# Altium PCB InfoDisplayPreReRoute.PcbDoc (part 2 of 2)
Units mil, origin at the board's own origin, x right, y up, seen from the top; angles counter-clockwise.
Board outline 4606.3 x 1732.28 mil, 2 copper layers (Top Layer, Bottom Layer), stack 65.792 mil thick; 218 components, 174 nets, 682 pads, 190 vias.
Unrouted connection lines stored in the file: 55.
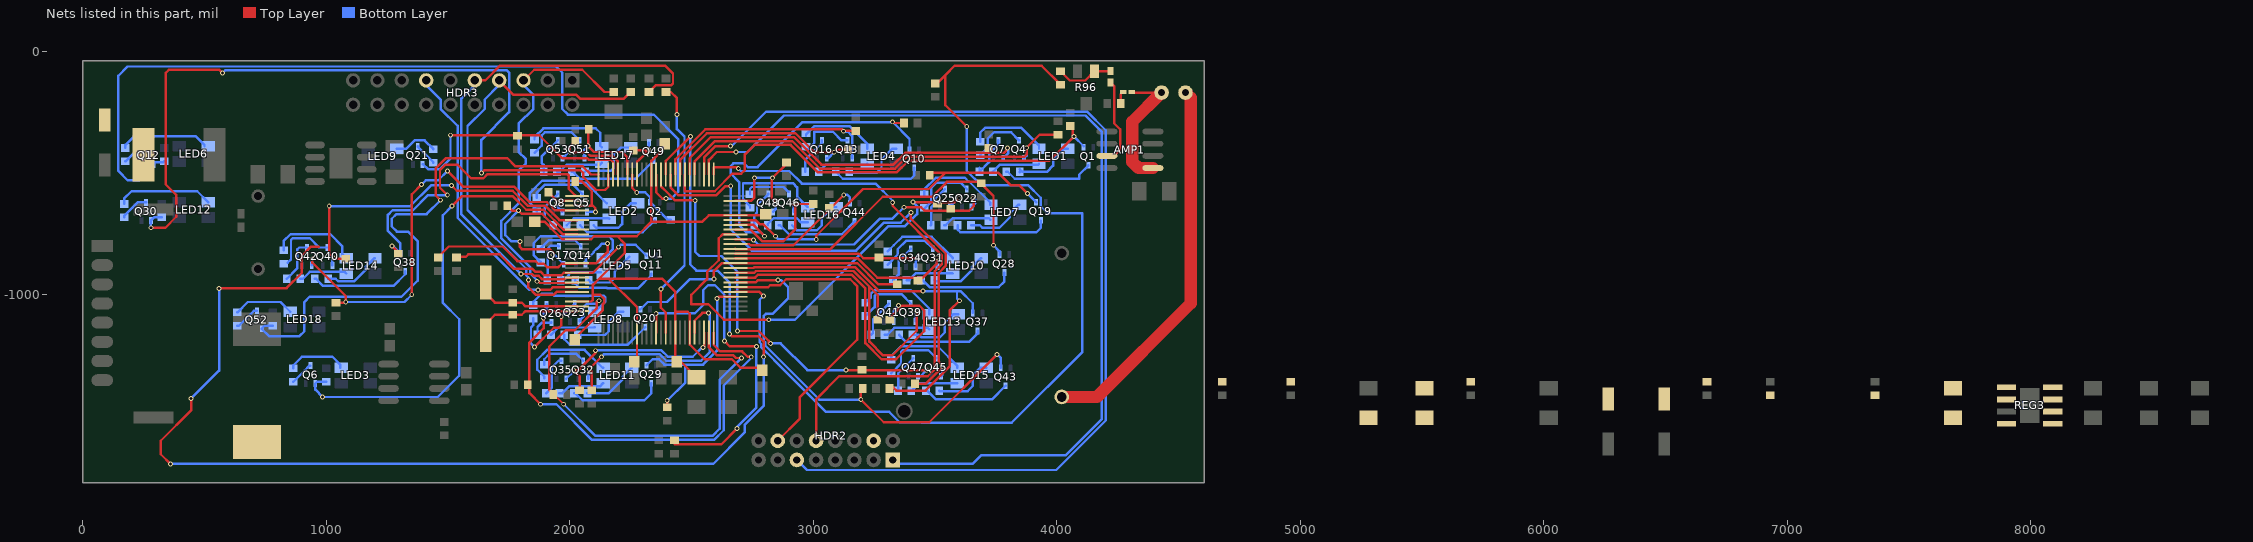
[diagram p2: the nets of this part, all layers, seen from the top]

## Via types
v1: diameter 20, hole 12, Top Layer to Bottom Layer, 173 vias
v2: diameter 50, hole 28, Top Layer to Bottom Layer, 7 vias
v3: diameter 19.68, hole 7.87, Top Layer to Bottom Layer, 6 vias
v4: diameter 137.8, hole 98.43, Top Layer to Bottom Layer, 4 vias

## Nets (pads, with @x,y where several pads share a name; then routed paths per layer and width w, separated by ;. In a path a pad name is that pad's centre, name@x,y a point inside that pad or via, vN(x,y) a via of type N, cw(c..) or ccw(c..) an arc to the next point about the centre after c; other vN are vias at no path point) (continued)
JTAG_TCK: HDR3.9 R1.1 U1.18 | length 2167
  Top Layer w10: HDR3.9@1610,-120 1652.69,-120 1713.69,-59 2390.58,-59 2423.72,-92.14 2423.72,-132.74 2417.27,-139.19 2353.37,-139.19 R1.1@2325,-167.56 ; v1(1800,-915) 1844.7,-915 1852.44,-922.74 1872.44,-922.74 1885.7,-936 1974.62,-936 1976.23,-934.39 1979.17,-934.39 1982.57,-931 2028.64,-931 U1.18@2030,-929.64
  Bottom Layer w10: HDR3.9@1610,-120 1610,-138.94 1555,-193.94 1555,-670 v1(1800,-915)
JTAG_TDI: HDR3.5 R3.1 U1.19 | length 1583.8
  Top Layer w10: HDR3.5@1810,-120 1854,-76 2051,-76 2142.56,-167.56 R3.1@2180,-167.56 ; v1(1865,-945) 1870,-945 1877,-952 2027.33,-952 U1.19@2030,-949.33
  Bottom Layer w10: HDR3.5@1810,-120 1810,-138.94 1850.53,-179.47 1850.53,-236.79 1790,-297.31 1790,-413.3 1820,-443.3 1820,-460.7 1790,-490.7 1790,-625.3 1719,-696.3 1719,-768.7 1837,-886.7 1837,-912 1870,-945 v1(1865,-945)
JTAG_TDO: HDR3.13 U1.20 | length 1235.6
  Top Layer w10: v1(1870,-980) 1920,-980 1930.99,-969.01 U1.20@2030,-969.01
  Bottom Layer w10: HDR3.13@1410,-120 1410,-138.94 1469.47,-198.42 1469.47,-236.79 1539,-306.31 1539,-684 1835,-980 v1(1870,-980)
JTAG_TMS: HDR3.7 R2.1 U1.21 | length 1807.6
  Top Layer w10: HDR3.7@1710,-120 1769.47,-179.47 2026.79,-179.47 2042.31,-195 2222.56,-195 R2.1@2250,-167.56 ; v1(1830,-940) 1830,-969.7 1861.3,-1001 1933.7,-1001 1946,-988.7 U1.21@2030,-988.7
  Bottom Layer w10: HDR3.7@1710,-120 1710,-138.94 1650.53,-198.42 1650.53,-236.79 1580,-307.31 1580,-652.33 1821,-893.33 1821,-921 1830,-930 v1(1830,-940)
LED_B_BATTERY: Q26.2 R71.1 U1.50 | length 1859.9
  Top Layer w10: v1(1880,-1450) 1834,-1404 1834,-1196.3 1892.5,-1137.8 v1(1892.5,-1095) ; U1.50@2591.02,-1156.02 2591.02,-1206.02 2618,-1233 2707.7,-1233 2729.7,-1255 v1(2745,-1255)
  Bottom Layer w10: v1(1880,-1450) 1945.3,-1450 2091.3,-1596 2592.54,-1596 2632,-1556.54 2632,-1373 2745,-1260 v1(2745,-1255) ; v1(1892.5,-1095) 1892.5,-1077.5 1905,-1065 Q26.2@1905,-1040
LED_B_BRAKING: Q41.2 R83.1 U1.58 | length 1437.4
  Top Layer w10: U1.58@2679.61,-929.64 2760.92,-929.64 2771.97,-918.59 3158.59,-918.59 3214,-974 3214,-1199 3280,-1265 3340,-1265 3455,-1150 3455,-1065 3435,-1045 3365.3,-1045 3315,-1095.3 R83.1@3315,-1102.44
  Bottom Layer w10: Q41.2@3330,-1110 3330,-1065 v1(3350,-1045)
LED_B_CHARGING: Q25.2 R70.1 U1.67 | length 1827.7
  Top Layer w10: U1.67@2679.61,-752.48 2627.52,-752.48 2611.64,-768.36 2611.64,-858.36 2564,-906 2564,-936 2499,-1001 2499,-1039 2569,-1039 2633,-1103 v1(2817,-1103) ; v1(3410,-620) 3580,-620 v1(3597.19,-602.81)
  Bottom Layer w10: v1(2817,-1103) 2924.22,-1103 3307.41,-719.82 3375.17,-719.82 3426,-668.99 3426,-636 v1(3410,-620) ; Q25.2@3560,-640 v1(3597.19,-602.81)
LED_B_CLUTCH: Q35.2 R78.1 U1.48 | length 800.4
  Top Layer w10: R78.1@2040,-1392.44 2040,-1335 v1(2015,-1310) 2035,-1310 2105,-1240 v1(2105,-1230) ; v1(2546.88,-1216.88) 2551.65,-1212.11 U1.48@2551.65,-1156.02
  Bottom Layer w10: Q35.2@1985.3,-1345 2015,-1315.3 v1(2015,-1310) ; v1@2105,-1229 2376.63,-1229 2402.63,-1255 2505,-1255 2543.12,-1216.88 v1(2546.88,-1216.88)
LED_B_DONE: Q48.2 R90.1 U1.74 | length 483.8
  Top Layer w10: U1.74@2679.61,-614.68 2744,-614.68 2758,-600.68 v1(2758,-520) ; v1(2847.93,-623.94) 2848.94,-623.94 2830,-605 2830,-523 v1(2833,-520) 2890,-463 R90.1@2890,-457.44
  Bottom Layer w10: v1(2758,-520) v1(2833,-520) ; Q48.2@2835,-660 2845,-650 2845,-630 2850,-625 2848.94,-623.94 v1(2847.93,-623.94)
LED_B_ENERGIZED: Q34.2 R77.1 U1.63 | length 807.4
  Top Layer w10: U1.63@2679.61,-831.22 3186.47,-831.22 3205.25,-850 3430.35,-850 v1(3433.73,-846.62)
  Bottom Layer w10: Q34.2@3420,-885 3420,-865 3433.73,-851.27 v1(3433.73,-846.62)
LED_B_ENGINE: Q17.2 R64.1 U1.9 | length 766.6
  Top Layer w10: R64.1@1742.56,-635 1762.56,-655 v1(1790,-655) 1802.35,-667.35 1886.24,-667.35 1971.37,-752.48 U1.9@2030,-752.48 ; v1(1794.94,-781) 1794.94,-804.18 1803.42,-812.65 1917.65,-812.65 v1@1932.5,-827.5
  Bottom Layer w10: v1(1790,-655) 1735,-710 1735,-755 1761,-781 v1(1794.94,-781) ; v1(1930,-835) 1935,-835 Q17.2@1975,-875 Q17.2@1975,-870
LED_B_FUEL: Q47.2 R89.1 U1.87 | length 1769.2
  Top Layer w10: U1.87@2374.49,-506.42 2374.49,-555.09 2379.24,-559.84 2379.24,-560.19 2385.68,-566.63 2386.03,-566.63 2432.4,-613 v1(2515,-613) ; v1(2688,-1149) 2776,-1149 2817,-1190 2817,-1200 v1(2825,-1200) ; v1(3135,-1310) v1(3465,-1310)
  Bottom Layer w10: v1(2515,-613) 2515,-824 2532,-841 2623,-841 2688,-906 v1(2688,-1149) ; v1(2825,-1200) 2866,-1200 2976,-1310 v1(3135,-1310) ; Q47.2@3430,-1335 3440,-1335 v1(3465,-1310)
LED_B_HYBRID: Q16.2 R63.1 U1.83 | length 871.1
  Top Layer w10: U1.83@2453.23,-506.42 2453.23,-446.77 2563,-337 2926.63,-337 3004.63,-415 v1(3085,-415) 3095,-405 R63.1@3142.44,-405
  Bottom Layer w10: Q16.2@3055,-440 3060,-440 v1(3085,-415)
LED_B_LOGGING: Q42.2 R84.1 U1.4 | length 1785.3
  Top Layer w10: v1(942.5,-852.5) 942.5,-868.5 1080,-1006 v1(1080,-1030) 1077.56,-1032.44 R84.1@1040,-1032.44 ; v1(1351,-1000) 1351,-588 v1(1391,-548) ; v1(1498,-492) 1562,-556 1771,-556 1834.35,-619.35 1906.12,-619.35 1940.83,-654.05 U1.4@2030,-654.05
  Bottom Layer w10: Q42.2@940,-880 940,-855 v1(942.5,-852.5) ; v1(1080,-1030) 1321,-1030 v1(1351,-1000) ; v1(1391,-548) 1409,-530 1460,-530 v1(1498,-492)
LED_B_MOTOR1: Q53.2 R93.1 U1.96 | length 361.6
  Top Layer w10: R93.1@2022.56,-370 2000,-392.56 v1(2000,-415) 2070,-415 2085,-430 2175,-430 2197.32,-452.32 U1.96@2197.32,-506.42
  Bottom Layer w10: Q53.2@1970,-440 1995,-415 v1(2000,-415)
LED_B_MOTOR2: Q8.2 R39.1 U1.2 | length 192
  Top Layer w10: R39.1@1912.56,-580 1947.91,-615.35 v1(1947.91,-623.78) 1961.22,-623.78 1970.32,-614.68 U1.2@2030,-614.68
  Bottom Layer w10: v1@1947.91,-625 1947.91,-637.91 Q8.2@1970,-660 ; v1(1947.91,-623.78) v1@1950.4,-626.27
LED_B_READY: Q7.2 R33.1 U1.81 | length 1558.7
  Top Layer w10: U1.81@2492.6,-506.42 2492.6,-439.13 2578.73,-353 2920,-353 3033,-466 3329,-466 3377.5,-417.5 3720,-417.5 ; R33.1@3720,-397.56 3720,-417.5 ; v1(3797.81,-397.95) 3800,-400.14 3782.64,-417.5 3720,-417.5
  Bottom Layer w10: Q7.2@3780,-440 3800,-420 3800,-400.14 v1(3797.81,-397.95)
LED_G_BATTERY: Q23.2 R69.1 U1.49 | length 1947.7
  Top Layer w10: v1(1975,-1450) 1915,-1390 1915,-1213.73 1982.73,-1146 2020.15,-1146 2110,-1056.15 2110,-1030 2115,-1025 v1(2120,-1025) ; U1.49@2571.34,-1156.02 2571.34,-1216.34 2604,-1249 2672.06,-1249 2683.06,-1260 v1(2705,-1260)
  Bottom Layer w10: v1(1975,-1450) 2105,-1580 2585.91,-1580 2616,-1549.91 2616,-1349 v1(2705,-1260) ; Q23.2@2040,-1110 2040,-1105.71 2058.33,-1087.38 2058.33,-1048.79 2069.77,-1037.35 2107.65,-1037.35 v1(2120,-1025) v1@2121.66,-1025
LED_G_BRAKING: Q39.2 R81.1 U1.59 | length 1335.2
  Top Layer w10: U1.59@2679.61,-909.96 2757.98,-909.96 2765.35,-902.59 3165.22,-902.59 3230,-967.37 ; R81.1@3265,-1102.44 3265,-1002.37 3230,-967.37 ; v1@3420,-1070 3425,-1075 3425,-1148 3324,-1249 3286.63,-1249 3230,-1192.37 3230,-967.37
  Bottom Layer w10: Q39.2@3420,-1110 v1@3420,-1070
  other v1: 3425,-1070
LED_G_CHARGING: Q22.2 R68.1 U1.66 | length 1149
  Top Layer w10: U1.66@2679.61,-772.16 2747.16,-772.16 2750,-775 v1(2755,-775) ; v1(3372,-641) 3442.5,-641 3456.18,-654.68 3640.32,-654.68 3658.41,-636.59 v1@3658.41,-604.47 ; v1(3655.32,-603.69) v1@3656.11,-604.47
  Bottom Layer w10: v1(2755,-775) 2774,-794 3167.75,-794 3273.93,-687.82 3325.18,-687.82 v1(3372,-641) ; Q22.2@3650,-640 3665,-625 3665,-605 3664.47,-604.47 3656.11,-604.47 v1(3655.32,-603.69)
LED_G_CLUTCH: Q32.2 R76.1 U1.46 | length 959.2
  Top Layer w10: R76.1@2090,-1392.44 2090,-1315 v1(2080,-1305) v1(2130,-1255) ; U1.46@2512.28,-1156.02 2512.28,-1107 2544.28,-1075 v1(2570,-1075)
  Bottom Layer w10: Q32.2@2075,-1345 2075,-1310 v1(2080,-1305) ; v1(2130,-1255) 2140,-1245 2370,-1245 2396,-1271 2539,-1271 2575,-1235 v1@2575,-1075
LED_G_DONE: Q46.2 R88.1 U1.68 | length 520.5
  Top Layer w10: U1.68@2679.61,-732.79 2742.79,-732.79 2791,-781 2876.29,-781 2925,-732.29 2925,-635 2920,-630 v1(2920,-621.25) ; v1@2920,-620 2927.56,-627.56 R88.1@3000,-627.56
  Bottom Layer w10: Q46.2@2920,-660 v1(2920,-621.25)
LED_G_ECONOMY: Q6.2 R30.2 U1.8 | length 2039.5
  Top Layer w10: v1(1517,-636) 1558,-595 1764.75,-595 1821.09,-651.35 1892.87,-651.35 1974.31,-732.79 U1.8@2030,-732.79
  Bottom Layer w10: R30.2@1000,-1357.56 962.44,-1357.56 Q6.2@955,-1365 955,-1390 v1(985,-1420) 1458,-1420 1546,-1332 1546,-1101 1479,-1034 1479,-674 v1(1517,-636)
LED_G_ENERGIZED: Q31.2 R75.1 U1.62 | length 949
  Top Layer w10: U1.62@2679.61,-850.9 3183.53,-850.9 3262.63,-930 3450,-930 3507.53,-872.47 v1(3507.53,-847)
  Bottom Layer w10: v1(3507.53,-847) 3507.53,-882.53 Q31.2@3510,-885
LED_G_ENGINE: Q14.2 R62.1 U1.15 | length 948.4
  Top Layer w10: R62.1@1458.78,-846.22 1503,-802 1724.88,-802 1784.88,-862 1859.58,-862 1870.58,-873 1893.05,-873 1908.05,-888 1951.95,-888 1966.95,-873 2027.59,-873 U1.15@2030,-870.59 2109.41,-870.59 2155,-825 v1(2155,-790)
  Bottom Layer w10: Q14.2@2065,-875 2065,-859.7 2098.33,-826.37 2098.33,-823.79 2111.12,-811 2113.7,-811 2126,-798.7 2126,-796.12 2132.12,-790 v1(2155,-790)
LED_G_FUEL: Q45.2 R87.1 U1.85 | length 2248.9
  Top Layer w10: U1.85@2413.86,-506.42 2413.86,-560.43 2444.43,-591 2602.02,-591 2639.02,-554 v1(2661,-554) ; v1(3401,-662) 3401,-688.14 3544.53,-831.67 3544.53,-880.72 3515,-910.25 3515,-1275 3530,-1290 v1(3530,-1295) 3530,-1297.33 3462.33,-1365 R87.1@3417.56,-1365
  Bottom Layer w10: v1(2661,-554) 2661,-732 2747.95,-818.95 3175.49,-818.95 3290.62,-703.82 3359.18,-703.82 v1(3401,-662) ; Q45.2@3525,-1335 3530,-1330 v1(3530,-1295) v1@3530,-1290
LED_G_HYBRID: Q13.2 R61.1 U1.84 | length 994.5
  Top Layer w10: U1.84@2433.54,-506.42 2433.54,-443.83 2556.37,-321 3118,-321 3125.29,-328.29 3125.94,-328.94 v1(3124.64,-328.94) 3126.03,-327.56 R61.1@3175,-327.56
  Bottom Layer w10: v1@3130,-330 3129,-330 3128,-331 3142.34,-331 3159.19,-347.85 3159.19,-439.19 Q13.2@3160,-440
LED_G_LOGGING: Q40.2 R82.1 U1.6 | length 1416.7
  Top Layer w10: v1(1012,-636) 1012,-832 v1(1030,-850) 1032.44,-852.44 R82.1@1080,-852.44 ; v1(1514.06,-551.06) 1536,-573 1765.37,-573 1827.72,-635.35 1899.49,-635.35 1957.57,-693.42 U1.6@2030,-693.42
  Bottom Layer w10: v1(1012,-636) 1345,-636 1429.94,-551.06 v1(1514.06,-551.06) ; Q40.2@1025,-880 1025,-855 v1(1030,-850)
LED_G_MOTOR1: Q51.2 R92.1 U1.94 | length 378
  Top Layer w10: R92.1@2077.56,-320 2075,-322.56 v1(2075,-390) 2099,-414 2214,-414 2236.69,-436.69 U1.94@2236.69,-506.42
  Bottom Layer w10: Q51.2@2060,-440 2060,-405 v1(2075,-390)
LED_G_MOTOR2: Q5.2 R24.1 U1.3 | length 274.6
  Top Layer w10: R24.1@2022.56,-535 2050,-535 2090.21,-575.21 2090.21,-630.21 2095,-635 ; U1.3@2030.63,-635 2095,-635 ; v1(2105,-660) 2105,-645 2095,-635
  Bottom Layer w10: Q5.2@2070,-660 v1(2105,-660)
LED_G_PERFORMANCE: Q52.2 R94.2 U1.100 | length 2278.4
  Top Layer w10: v1(1469,-612) 1448.7,-591.7 1448.7,-482.35 1492.05,-439 1743,-439 1777,-473 2053,-473 2086.42,-506.42 U1.100@2118.58,-506.42
  Bottom Layer w10: R94.2@780,-1127.56 746.81,-1127.56 Q52.2@734.69,-1139.69 765,-1170 890,-1170 910,-1150 910,-1030 931.29,-1008.71 1308.86,-1008.71 1375,-942.56 1375,-780 1336,-741 1290.09,-741 1269,-719.91 1269,-688 1288,-669 1412,-669 v1(1469,-612)
LED_G_READY: Q4.2 R21.1 U1.80 | length 1749.2
  Top Layer w10: U1.80@2512.28,-506.42 2512.28,-453.72 2597,-369 2913.37,-369 3026.37,-482 3335.63,-482 3383.63,-434 3866,-434 3876.15,-423.85 v1(3876.15,-396.48) 3930.07,-342.56 R21.1@4005,-342.56
  Bottom Layer w10: Q4.2@3865,-440 3876.15,-428.85 v1(3876.15,-396.48)
LED_R_BATTERY: Q20.2 R66.1 U1.61 | length 1188.8
  Top Layer w10: v1(2592,-936) 2592,-903 2624.41,-870.59 U1.61@2679.61,-870.59 3180.59,-870.59 3267.56,-957.56 R66.1@3345,-957.56
  Bottom Layer w10: Q20.2@2290,-1060 2320,-1030 2399.7,-1030 2493.7,-936 v1(2592,-936)
LED_R_BRAKING: Q37.2 R79.1 U1.60 | length 1702.9
  Top Layer w10: U1.60@2679.61,-890.27 2755.04,-890.27 2758.72,-886.59 3171.84,-886.59 3270.25,-985 v1(3450,-985) ; R79.1@3312.56,-1380 3327.56,-1380 3341.28,-1393.72 3460.98,-1393.72 3560,-1294.7 3560,-1065 v1(3600,-1025)
  Bottom Layer w10: v1(3450,-985) 3590,-985 ; v1(3600,-1025) 3590,-1015 3590,-985 ; Q37.2@3655,-1075 3655,-1035 3605,-985 3590,-985
LED_R_CHARGING: Q19.2 R65.1 U1.70 | length 1509.2
  Top Layer w10: U1.70@2679.61,-693.42 2763,-693.42 2780.58,-711 2795,-711 2844,-760 v1(2845,-760) ; v1(3012,-773) 3012,-758 3204,-566 3474,-566 3540.31,-499.69 ; R65.1@3477.56,-510 3487.87,-499.69 3540.31,-499.69 ; v1(3880,-585) 3844.81,-549.81 3810.43,-549.81 3760.32,-499.69 3540.31,-499.69
  Bottom Layer w10: v1(2845,-760) 2844,-760 2857,-773 v1(3012,-773) ; v1(3880,-585) Q19.2@3915,-620
LED_R_CLUTCH: Q29.2 R73.1 U1.54 | length 831.8
  Top Layer w10: R73.1@2400,-1462.44 v1(2400,-1435) ; v1(2605,-1015) 2611.62,-1008.38 U1.54@2679.61,-1008.38
  Bottom Layer w10: Q29.2@2315,-1290 2340,-1265 2366.58,-1265 2388.58,-1287 2475,-1287 ; v1(2400,-1435) 2475,-1360 2475,-1287 ; v1(2605,-1015) 2605,-1229.7 2547.7,-1287 2475,-1287
LED_R_DONE: Q44.2 R86.1 U1.65 | length 587.4
  Top Layer w10: U1.65@2679.61,-791.85 2737.15,-791.85 2742.3,-797 2918,-797 v1(3125,-590)
  Bottom Layer w10: v1(3125,-590) 3140,-590 3150,-600 Q44.2@3150,-625
LED_R_ENERGIZED: Q28.2 R72.1 U1.64 | length 1453.2
  Top Layer w10: U1.64@2679.61,-811.53 2681.07,-813 3070,-813 3285,-598 3487.25,-598 3548.25,-537 3682,-537 3740,-595 v1@3740,-796.97
  Bottom Layer w10: v1(3739.5,-796.97) 3764.98,-822.44 Q28.2@3764.98,-838.26
LED_R_ENGINE: Q11.2 R56.1 U1.17 | length 891.6
  Top Layer w10: R56.1@1535,-847.44 1538.44,-844 1573.37,-844 1583.37,-834 1711.63,-834 1771.63,-894 1846.33,-894 1858.6,-906.27 1881.07,-906.27 1894.79,-920 1965.21,-920 1975.25,-909.96 U1.17@2030,-909.96 2095.04,-909.96 v1(2200,-805)
  Bottom Layer w10: v1(2200,-805) 2210,-795 2270,-795 Q11.2@2315,-840
LED_R_FAULT: Q12.2 R60.1 U1.88 | length 3560.7
  Top Layer w10: U1.88@2354.8,-506.42 2354.8,-580.41 2379.7,-605.3 v1(2395,-605.3)
  Bottom Layer w10: R60.1@335,-452.56 331.34,-456.22 298.78,-456.22 Q12.2@290,-465 274.69,-480.31 274.69,-488 232.69,-530 184,-530 146,-492 146,-101 184,-63 1944,-63 1969,-88 1969,-237.53 1992,-260.53 2344.83,-260.53 2445,-360.7 2445,-577.4 2417.09,-605.3 v1(2395,-605.3)
LED_R_FUEL: Q43.2 R85.1 U1.57 | length 1847.1
  Top Layer w10: U1.57@2679.61,-949.33 2763.86,-949.33 2773.19,-940 v1(2855,-940) ; R85.1@3202.56,-1380 3195,-1387.56 v1(3195,-1430) 3289,-1524 3476,-1524 v1(3755,-1245)
  Bottom Layer w10: v1(2855,-940) 2868,-940 2896,-968 2896,-1014.91 2832.21,-1078.7 2805.3,-1078.7 2796,-1088 2796,-1189.67 2803,-1196.67 2803,-1209.67 3024.33,-1431 3195,-1431 v1(3195,-1430) ; v1(3755,-1245) 3770,-1260 Q43.2@3770,-1300
LED_R_GROUND: Q21.2 R67.1 U1.97 | length 1000.8
  Top Layer w10: v1(1510,-345) 1874.7,-345 1969.7,-440 2072.37,-440 2078.37,-446 2168.37,-446 2177.64,-455.27 U1.97@2177.64,-506.42
  Bottom Layer w10: Q21.2@1395,-465 1398.42,-465 1417.73,-484.31 1465.69,-484.31 1510,-440 v1(1510,-345)
LED_R_HYBRID: Q10.2 R42.1 U1.69 | length 1464
  Top Layer w10: U1.69@2679.61,-713.11 2754.11,-713.11 2800,-759 v1(2800,-760) ; v1(3325,-290) 3330,-295 R42.1@3372.44,-295
  Bottom Layer w10: v1(2800,-760) 2800,-759 2785,-744 2726,-744 2695.28,-713.28 2695.28,-537.28 2661,-503 2661,-472 2672,-461 2716,-461 2731,-476 2771,-476 2956,-291 v1@3325,-291 ; v1@3326,-291 3395,-360 Q10.2@3395,-405
LED_R_LOGGING: Q38.2 R80.1 U1.1 | length 1324.3
  Top Layer w10: v1(1270,-800) 1295,-825 R80.1@1295,-832.44 ; v1(1497,-591) 1467,-561 1467,-488 1488,-467 1540,-467 1595,-522 1645.7,-522 1662.7,-505 1990,-505 1995,-510 1995,-565 U1.1@2022.5,-592.5
  Bottom Layer w10: v1(1270,-800) 1274.37,-800 Q38.2@1304.37,-830 1304.37,-789.37 1253,-738 1253,-672 1272,-653 1356,-653 1418,-591 v1(1497,-591)
LED_R_MOTOR1: Q49.2 R91.1 U1.92 | length 214.3
  Top Layer w10: R91.1@2260,-407.56 v1@2322.44,-407.56 ; U1.92@2276.06,-506.42 2276.06,-453.64 2283.49,-446.21 2283.79,-446.21 v1@2322.44,-407.56 ; v1(2325,-405) v1@2322.44,-407.56
  Bottom Layer w10: v1(2325,-405) Q49.2@2325,-375
LED_R_MOTOR2: Q2.2 R15.1 U1.93 | length 272.6
  Top Layer w10: U1.93@2256.38,-506.42 2256.38,-561.38 v1@2270,-575
  Bottom Layer w10: v1(2275,-580) 2310,-580 2330,-600 Q2.2@2330,-620 2402.56,-692.56 R15.1@2415,-692.56
LED_R_READY: Q1.2 R9.1 U1.82 | length 1995.6
  Top Layer w10: U1.82@2472.91,-506.42 2472.91,-575 2595.39,-575 2667.39,-503 2704,-503 2719,-488 2719,-424 2758,-385 2906.75,-385 3019.75,-498 3342.25,-498 3390.25,-450 3970,-450 v1(4070,-350) 4065,-345 4065,-317.56 R9.1@4055,-307.56
  Bottom Layer w10: v1(4070,-350) Q1.2@4110.31,-390.31
LED_R_WARNING: Q30.2 R74.1 U1.98 | length 3326.1
  Top Layer w10: v1(280,-725) 339,-725 384,-680 384,-590 341,-547 341,-89 353,-77 561,-77 v1(574,-90) ; v1(1637,-501) 1649,-489 2044,-489 2055,-500 2055,-517.37 2107.63,-570 2145,-570 2157.95,-557.05 U1.98@2157.95,-506.42
  Bottom Layer w10: v1(280,-725) Q30.2@280,-695 292.44,-682.56 R74.1@325,-682.56 ; v1(574,-90) 585,-79 1742,-79 1751,-88 1751,-250 1637,-364 v1(1637,-501)
NetAMP1_3: AMP1.3 C26.2 | length 357.8
  Top Layer w10: AMP1.3@4205.51,-430 4235,-430 4260,-405 4260,-320.73 4235,-295.73 4235,-143.62 C26.2@4220,-128.62
NetAMP1_5: AMP1.5 C27.1 C28.2 | length 553
  Top Layer w10: C28.2@4307.72,-167.28 4310.43,-170 C27.1@4430,-170
  Top Layer w50: AMP1.5@4394.49,-480 4335,-480 4310,-455 4310,-290 C27.1@4430,-170
NetC16_1: C16.1 C17.1 C18.1 C19.1 C20.1 C21.1 C22.1 C25.1 U1.10 U1.23 U1.34 U1.42 U1.45 U1.71 U1.89 | length 3736.9
  Top Layer w10: C17.1@1855.43,-700 1896.27,-700 1968.43,-772.16 U1.10@2030,-772.16 2087.84,-772.16 2100,-760 2195,-760 ; C22.1@2020,-1169.57 2030.43,-1169.57 2135,-1065 2135,-1039.7 2141,-1033.7 2141,-1016.3 2124.7,-1000 2095,-1000 ; U1.23@2030,-1028.07 2086.93,-1028.07 ; 2088,-1028.07 2095,-1021.07 2095,-1000 ; 2159.49,-934.49 2276.06,-1051.06 U1.34@2276.06,-1156.02 2276.06,-1273.5 2275,-1274.57 C18.1@2265,-1274.57 ; C20.1@2390,-380.43 2390,-395.43 2335,-450.43 2335,-700 ; 2433.54,-1103.46 U1.42@2433.54,-1156.02 ; 2436.14,-1070 2484.37,-1070 2492.6,-1078.23 U1.45@2492.6,-1156.02 2492.6,-1205.04 2552.55,-1265 2665.43,-1265 2700.43,-1300 2790,-1300 C19.1@2790,-1309.57 C19.1@2790,-1311.53 ; C16.1@2520,-1338.98 2460,-1278.98 2444.41,-1278.98 C25.1@2440,-1274.57 2433.54,-1268.11 U1.42@2433.54,-1156.02 ; C21.1@2804.57,-670 2800.83,-673.74 U1.71@2679.61,-673.74 2571.26,-673.74 2545,-700 2335,-700 ; 2095,-1000 2095,-960 2121.03,-933.97 ; 2121.03,-933.97 2225,-830 2225,-790 2195,-760 ; 2121.03,-933.97 2378.97,-933.97 2433.54,-988.54 U1.42@2433.54,-1156.02 ; 2195,-760 2275,-760 2335,-700
NetC26_1: C26.1 R95.1 R96.1 | length 236.9
  Top Layer w10: R95.1@4015,-82.44 4053.01,-120.45 4116.87,-120.45 R96.1@4155.43,-81.89 4219.49,-81.89 C26.1@4220,-81.38
NetC27_2: C27.2 SPK1.1 | length 1563.5
  Top Layer w50: SPK1.1@4020,-1420 4165.2,-1420 4550,-1035.2 4550,-191.57 C27.2@4528.43,-170
NetC28_1: C28.1 R97.1 | length 51.7
  Top Layer w10: R97.1@4262.56,-215 4262.56,-177.01 C28.1@4272.28,-167.28
NetC33_1: C33.1 REG3.2
NetC33_2: C33.2 L1.1 REG3.1 ZD3.K
NetC35_1: C35.1 REG3.5
NetC35_2: C35.2 R105.2
NetC36_1: C36.1 REG3.7
NetLED1_1: LED1.1 R7.2 | length 273
  Bottom Layer w10: R7.2@3847.56,-497 R7.2@3847.56,-495 ; LED1.1@4045,-400 4030,-400 3985,-445 3985,-469.65 3959.01,-495.65 R7.2@3858.2,-495.65 ; R7.2@3852.56,-490 3847.56,-485 R7.2@3852.56,-490 ; R7.2@3852.56,-490 R7.2@3858.2,-495.65 ; R7.2@3852.56,-490 R7.2@3858.2,-495.65
NetLED1_3: LED1.3 R13.2 | length 202.9
  Bottom Layer w10: R13.2@3737.56,-495 3766.95,-465.61 3795.91,-465.61 3796.3,-466 3923.88,-466 LED1.3@3926.89,-462.99
NetLED1_4: LED1.4 R10.2 | length 330.1
  Bottom Layer w10: R10.2@3685,-372.44 3685,-335 3705,-315 3854.3,-315 3926.89,-387.59 LED1.4@3926.89,-400
NetLED2_1: LED2.1 R8.2 | length 247.3
  Bottom Layer w10: R8.2@2097.56,-715 2107.56,-725 2200,-725 2215,-710 2215,-660 2250,-625 LED2.1@2270,-625
NetLED2_3: LED2.3 R14.2 | length 186.9
  Bottom Layer w10: R14.2@1987.56,-715 2016.28,-686.28 2160.18,-686.28 LED2.3@2161.89,-687.99
NetLED2_4: LED2.4 R11.2 | length 462.4
  Bottom Layer w10: R11.2@1865,-657.56 1865,-651.46 1836.28,-622.75 1836.28,-582.14 1886.6,-531.82 2021.82,-531.82 2030,-540 2066.89,-540 LED2.4@2151.89,-625
NetLED3_4: LED3.4 R12.2 | length 245.1
  Bottom Layer w10: R12.2@865,-1302.44 865,-1290 900,-1255 1025,-1255 1056.89,-1286.89 LED3.4@1056.89,-1300
NetLED4_1: LED4.1 R16.2 | length 259.4
  Bottom Layer w10: R16.2@3147.56,-495 3147.56,-500 3260,-500 3280,-480 3280,-445 3325,-400 LED4.1@3340,-400
NetLED4_3: LED4.3 R22.2 | length 212.6
  Bottom Layer w10: R22.2@3022.56,-495 3051.56,-466 3218.88,-466 LED4.3@3221.89,-462.99
NetLED4_4: LED4.4 R19.2 | length 320
  Bottom Layer w10: R19.2@2970,-347.44 2970,-342.37 3004.43,-307.94 3147.94,-307.94 3221.89,-381.89 LED4.4@3221.89,-400
NetLED5_1: LED5.1 R17.2 | length 230.8
  Bottom Layer w10: R17.2@2077.56,-940 2087.56,-950 2165,-950 2185,-930 2185,-903.22 2243.22,-845 LED5.1@2245,-845
NetLED5_3: LED5.3 R23.2 | length 176.4
  Bottom Layer w10: R23.2@1962.56,-935 1980,-935 1995.69,-919.31 1995.69,-917.73 2005.43,-907.99 LED5.3@2126.89,-907.99
NetLED5_4: LED5.4 R20.2 | length 531.4
  Bottom Layer w10: R20.2@1880,-865 1851.28,-836.28 1851.28,-788.72 1880,-760 2160,-760 2176,-776 2176,-814 2145,-845 LED5.4@2126.89,-845
NetLED6_1: LED6.1 R18.2 | length 371.4
  Bottom Layer w10: R18.2@175,-397.44 175,-385 210,-350 465,-350 500,-385 LED6.1@500,-390
NetLED7_1: LED7.1 R25.2 | length 250.7
  Bottom Layer w10: R25.2@3647.56,-715 3684.13,-715 3694.77,-725.65 3763.31,-725.65 3806.44,-682.52 3806.44,-666.78 3843.22,-630 LED7.1@3845,-630
NetLED7_3: LED7.3 R31.2 | length 204
  Bottom Layer w10: R31.2@3537.56,-715 3543.42,-715 3572.14,-686.28 3720.18,-686.28 LED7.3@3726.89,-692.99
NetLED7_4: LED7.4 R28.2 | length 366.1
  Bottom Layer w10: R28.2@3455,-592.44 3455,-568.08 3503.08,-520 3622.37,-520 3638.37,-536 3640.3,-536 3726.89,-622.59 LED7.4@3726.89,-630
NetLED8_1: LED8.1 R26.2 | length 250.8
  Bottom Layer w10: R26.2@2032.56,-1165 2033.2,-1165.65 2144.35,-1165.65 2160,-1150 2160,-1110 2200,-1070 LED8.1@2220,-1070
NetLED8_3: LED8.3 R32.2 | length 192.6
  Bottom Layer w10: R32.2@1922.56,-1165 1952.78,-1134.78 2100.1,-1134.78 LED8.3@2101.89,-1132.99
NetLED8_4: LED8.4 R29.2 | length 417.6
  Bottom Layer w10: R29.2@1850,-1042.44 1850,-1029.7 1884.7,-995 1926.28,-995 1935.28,-1004 2139,-1004 2145,-1010 2145,-1029.7 2104.7,-1070 LED8.4@2101.89,-1070 LED8.4@2095,-1063.11
NetLED9_1: LED9.1 R27.2 | length 178.8
  Bottom Layer w10: LED9.1@1290,-400 1329.29,-400 1362.88,-366.4 1403.96,-366.4 R27.2@1440,-402.44
NetLED10_1: LED10.1 R34.2 | length 241.1
  Bottom Layer w10: R34.2@3497.56,-940 3503.2,-945.65 3604.01,-945.65 3651.44,-898.21 3651.44,-886.78 3688.22,-850 LED10.1@3690,-850
NetLED10_3: LED10.3 R40.2 | length 201.9
  Bottom Layer w10: R40.2@3382.56,-940 3393.42,-940 3422.14,-911.28 3570.18,-911.28 LED10.3@3571.89,-912.99
NetLED10_4: LED10.4 R37.2 | length 329.9
  Bottom Layer w10: R37.2@3305,-822.44 3330.44,-797 3365.62,-761.82 3486.12,-761.82 3571.89,-847.59 LED10.4@3571.89,-850
NetLED11_1: LED11.1 R35.2 | length 232.6
  Bottom Layer w10: R35.2@2072.56,-1405 2159.65,-1405 2216.44,-1348.21 2216.44,-1336.78 2253.22,-1300 LED11.1@2255,-1300
NetLED11_3: LED11.3 R41.2 | length 196.7
  Bottom Layer w10: R41.2@1957.56,-1405 1968.42,-1405 1997.14,-1376.28 2123.6,-1376.28 LED11.3@2136.89,-1362.99
NetLED11_4: LED11.4 R38.2 | length 404.9
  Bottom Layer w10: R38.2@1895,-1342.56 1895,-1336.46 1866.28,-1307.75 1866.28,-1267.14 1906.6,-1226.82 2061.12,-1226.82 2134.3,-1300 LED11.4@2136.89,-1300
NetLED12_1: LED12.1 R36.2 | length 398.5
  Bottom Layer w10: R36.2@170,-627.44 170,-605 200,-575 470,-575 LED12.1@515,-620
NetLED13_1: LED13.1 R43.2 | length 254.9
  Bottom Layer w10: R43.2@3407.56,-1165 3434.13,-1165 3444.77,-1175.65 3519.35,-1175.65 3540,-1155 3540,-1115 3575,-1080 LED13.1@3595,-1080
NetLED13_3: LED13.3 R47.2 | length 199
  Bottom Layer w10: R47.2@3292.56,-1165 3303.42,-1165 3332.14,-1136.28 3470.18,-1136.28 LED13.3@3476.89,-1142.99
NetLED13_4: LED13.4 R45.2 | length 345.1
  Bottom Layer w10: R45.2@3215,-1032.44 3235.44,-1012 3235.44,-997.64 3251.26,-981.82 3401.12,-981.82 3476.89,-1057.59 LED13.4@3476.89,-1080
NetLED14_1: LED14.1 R44.2 | length 243.2
  Bottom Layer w10: R44.2@1007.56,-935 1039.13,-935 1049.77,-945.65 1114.01,-945.65 1161.44,-898.21 1161.44,-886.78 1198.22,-850 LED14.1@1200,-850
NetLED14_3: LED14.3 R48.2 | length 204
  Bottom Layer w10: R48.2@892.56,-935 903.42,-935 932.14,-906.28 1075.18,-906.28 LED14.3@1081.89,-912.99
NetLED14_4: LED14.4 R46.2 | length 366.1
  Bottom Layer w10: R46.2@825,-817.44 825,-780 853.18,-751.82 1016.82,-751.82 1065,-800 1065,-833.11 LED14.4@1081.89,-850
NetLED15_1: LED15.1 R49.2 | length 258.7
  Bottom Layer w10: R49.2@3517.56,-1395 3518.2,-1395.65 3634.35,-1395.65 3655,-1375 3655,-1330 3685,-1300 LED15.1@3710,-1300
NetLED15_3: LED15.3 R53.2 | length 202.6
  Bottom Layer w10: R53.2@3402.56,-1395 3434.57,-1362.99 LED15.3@3591.89,-1362.99
NetLED15_4: LED15.4 R51.2 | length 344.6
  Bottom Layer w10: R51.2@3320,-1267.44 3320,-1252.37 3360.55,-1211.82 3511.12,-1211.82 3591.89,-1292.59 LED15.4@3591.89,-1300
NetLED16_1: LED16.1 R50.2 | length 248.2
  Bottom Layer w10: R50.2@2912.56,-715 2933.21,-735.65 3014.35,-735.65 3035,-715 3035,-685 3080,-640 LED16.1@3095,-640
NetLED16_3: LED16.3 R54.2 | length 185.6
  Bottom Layer w10: R54.2@2812.56,-715 2812.56,-710.86 2837.14,-686.28 2932.86,-686.28 2949.57,-702.99 LED16.3@2976.89,-702.99
NetLED16_4: LED16.4 R52.2 | length 439.7
  Bottom Layer w10: R52.2@2740,-642.56 2740,-636.46 2711.28,-607.75 2711.28,-543.72 2713.18,-541.82 2916.12,-541.82 2933.56,-559.26 2933.56,-596.67 LED16.4@2976.89,-640
NetLED17_1: LED17.1 R55.2 | length 260.9
  Bottom Layer w10: R55.2@2062.56,-495 2066.48,-491.08 2168.92,-491.08 2180,-480 2180,-425 2209.57,-395.43 LED17.1@2250,-395.43
NetLED17_3: LED17.3 R59.2 | length 199.5
  Bottom Layer w10: R59.2@1947.56,-495 1958.42,-495 1987.14,-466.28 2124.03,-466.28 LED17.3@2131.89,-458.43
NetLED17_4: LED17.4 R57.2 | length 365.2
  Bottom Layer w10: R57.2@1855,-362.44 1855,-353.08 1891.26,-316.82 2106.82,-316.82 2125,-335 2125,-388.54 LED17.4@2131.89,-395.43
NetLED18_4: LED18.4 R58.2 | length 251
  Bottom Layer w10: R58.2@635,-1072.44 677.44,-1030 811.89,-1030 LED18.4@851.89,-1070
NetPTC1_1: PTC1.1 ZD1.K
NetQ1_1: Q1.1 R7.1 | length 381.5
  Bottom Layer w10: R7.1@3792.44,-495 3798.54,-495 3827.25,-523.72 4091.21,-523.72 4091.21,-507.29 Q1.1@4129.69,-468.82
NetQ2_1: Q2.1 R8.1 | length 339.8
  Bottom Layer w10: R8.1@2042.44,-715 2071.16,-743.72 2299.79,-743.72 Q2.1@2349.68,-693.82
NetQ4_1: Q4.1 R10.1 | length 235.4
  Bottom Layer w10: R10.1@3685,-427.56 3716.44,-396.12 3716.44,-358.56 3742.18,-332.82 3811.95,-332.82 Q4.1@3845.31,-366.18
NetQ5_1: Q5.1 R11.1 | length 237.1
  Bottom Layer w10: R11.1@1865,-602.44 1865,-580.7 1897.88,-547.82 2012.82,-547.82 2050.32,-585.31 Q5.1@2050.32,-586.18
NetQ6_1: Q6.1 R12.1 | length 97.8
  Bottom Layer w10: R12.1@865,-1357.56 910.32,-1312.24 931.38,-1291.18 Q6.1@935.32,-1291.18
NetQ7_1: Q7.1 R13.1 | length 176.9
  Bottom Layer w10: R13.1@3682.44,-479.14 R13.1@3682.44,-495 3721.76,-455.69 3721.76,-421.66 3760.31,-383.1 Q7.1@3760.31,-366.18
NetQ8_1: Q8.1 R14.1 | length 165.4
  Bottom Layer w10: R14.1@1932.44,-715 1897.23,-679.79 1897.23,-639.26 Q8.1@1950.32,-586.18
NetQ10_1: Q10.1 R16.1 | length 371.1
  Bottom Layer w10: R16.1@3092.44,-495 3121.16,-523.72 3401.21,-523.72 3414.68,-510.24 Q10.1@3414.69,-478.82
NetQ11_1: Q11.1 R17.1 | length 363
  Bottom Layer w10: R17.1@2022.44,-940 2022.44,-955 2039.44,-972 2152.25,-972 2153.25,-973 2282,-973 2334.68,-920.32 Q11.1@2334.68,-913.82
NetQ12_1: Q12.1 R18.1 | length 120.7
  Bottom Layer w10: R18.1@175,-452.56 236.38,-391.18 Q12.1@270.32,-391.18
NetQ13_1: Q13.1 R19.1 | length 241.7
  Bottom Layer w10: R19.1@2970,-402.56 2977.44,-402.56 3003.72,-376.28 3003.72,-331.28 3005,-330 3080,-330 3116.18,-366.18 Q13.1@3140.31,-366.18
NetQ14_1: Q14.1 R20.1 | length 189.8
  Bottom Layer w10: R20.1@1880,-810 1914,-776 2020.13,-776 Q14.1@2045.32,-801.18
NetQ16_1: Q16.1 R22.1 | length 156.9
  Bottom Layer w10: R22.1@2967.44,-495 2967.44,-444.14 3035.32,-376.26 Q16.1@3035.32,-366.18
NetQ17_1: Q17.1 R23.1 | length 176.7
  Bottom Layer w10: R23.1@1907.44,-935 1908.72,-933.73 1908.72,-811.59 1921.3,-799 1953.13,-799 Q17.1@1955.32,-801.18
NetQ19_1: Q19.1 R25.1 | length 400.7
  Bottom Layer w10: R25.1@3592.44,-715 3592.44,-732.44 3603.72,-743.72 3916.21,-743.72 3934.69,-725.24 Q19.1@3934.69,-696.57
NetQ20_1: Q20.1 R26.1 | length 388.5
  Bottom Layer w10: R26.1@1977.44,-1165 1977.44,-1182.44 2000,-1205 2238.5,-1205 Q20.1@2309.68,-1133.82
NetQ21_1: Q21.1 R27.1 | length 93.2
  Bottom Layer w10: Q21.1@1375.32,-391.18 1440,-455.87 R27.1@1440,-457.56
NetQ22_1: Q22.1 R28.1 | length 264
  Bottom Layer w10: R28.1@3455,-647.56 3485,-617.56 3485,-560.7 3505.7,-540 3604.13,-540 Q22.1@3630.31,-566.18
NetQ23_1: Q23.1 R29.1 | length 387.8
  Top Layer w10: v1(1855,-1215) 1934,-1136 1955.19,-1136 1965,-1126.19 v1(1965,-1090)
  Bottom Layer w10: R29.1@1850,-1097.56 1850,-1125 1840.69,-1134.31 1840.69,-1200.69 v1(1855,-1215) ; v1(1965,-1090) 1966.5,-1090 Q23.1@2020.32,-1036.18
NetQ25_1: Q25.1 R31.1 | length 172.8
  Bottom Layer w10: R31.1@3482.44,-715 3483.72,-713.73 3483.72,-641.47 3501,-624.19 3501,-605.5 Q25.1@3540.31,-566.18
NetQ26_1: Q26.1 R32.1 | length 97.4
  Bottom Layer w10: R32.1@1867.44,-1165 1867.44,-1132.56 1884,-1116 1922.5,-1116 Q26.1@1924.68,-1113.82
NetQ28_1: Q28.1 R34.1 | length 400.3
  Bottom Layer w10: R34.1@3442.44,-940 3448.54,-940 3477.25,-968.72 3761.28,-968.72 3784.69,-945.32 Q28.1@3784.69,-908.82
NetQ29_1: Q29.1 R35.1 | length 382.4
  Bottom Layer w10: R35.1@2017.44,-1405 2023.54,-1405 2052.25,-1433.72 2306.28,-1433.72 2334.68,-1405.32 Q29.1@2334.68,-1363.82
NetQ30_1: Q30.1 R36.1 | length 119.3
  Bottom Layer w10: R36.1@170,-682.56 170,-676.46 225.28,-621.18 Q30.1@260.32,-621.18
NetQ31_1: Q31.1 R37.1 | length 253.7
  Bottom Layer w10: R37.1@3305,-877.56 3346.44,-836.12 3346.44,-813.56 3382.18,-777.82 3456.95,-777.82 Q31.1@3490.31,-811.18
NetQ32_1: Q32.1 R38.1 | length 203.7
  Bottom Layer w10: R38.1@1895,-1287.44 1895,-1265 1917.18,-1242.82 2026.95,-1242.82 Q32.1@2055.32,-1271.18
NetQ34_1: Q34.1 R40.1 | length 159
  Bottom Layer w10: R40.1@3327.44,-940 3350,-917.44 3350,-861.5 Q34.1@3400.31,-811.18
NetQ35_1: Q35.1 R41.1 | length 166.9
  Bottom Layer w10: R41.1@1902.44,-1405 1925,-1382.44 1925,-1300 1953.82,-1271.18 Q35.1@1965.62,-1271.18
NetQ37_1: Q37.1 R43.1 | length 358.7
  Bottom Layer w10: R43.1@3352.44,-1165 3381.16,-1193.72 3640,-1193.72 3674.69,-1159.03 Q37.1@3674.69,-1148.82
NetQ38_1: Q38.1 R44.1 | length 415.4
  Bottom Layer w10: R44.1@952.44,-935 958.54,-935 987.25,-963.72 1276.28,-963.72 1324.06,-915.94 Q38.1@1324.06,-903.82
NetQ39_1: Q39.1 R45.1 | length 265.8
  Bottom Layer w10: R45.1@3215,-1087.56 3251.44,-1051.12 3251.44,-1004.26 3257.88,-997.82 3361.95,-997.82 Q39.1@3400.31,-1036.18
NetQ40_1: Q40.1 R46.1 | length 268.7
  Bottom Layer w10: R46.1@841.22,-868.78 855,-855 855,-775 862.18,-767.82 932.12,-767.82 970.48,-806.18 Q40.1@1005.32,-806.18
NetQ41_1: Q41.1 R47.1 | length 159
  Bottom Layer w10: R47.1@3237.44,-1165 3245,-1157.44 3245,-1101.5 Q41.1@3310.31,-1036.18
NetQ42_1: Q42.1 R48.1 | length 181.6
  Bottom Layer w10: R48.1@837.44,-935 880.32,-892.13 880.32,-814.68 888.82,-806.18 Q42.1@920.32,-806.18
NetQ43_1: Q43.1 R49.1 | length 365
  Bottom Layer w10: R49.1@3462.44,-1395 3468.54,-1395 3503.55,-1430.01 3733.49,-1430.01 Q43.1@3789.69,-1373.82
NetQ44_1: Q44.1 R50.1 | length 349.3
  Bottom Layer w10: R50.1@2857.44,-715 2863.54,-715 2900.18,-751.65 3116.86,-751.65 Q44.1@3169.69,-698.82
NetQ45_1: Q45.1 R51.1 | length 266.2
  Bottom Layer w10: R51.1@3320,-1322.56 3360,-1282.56 3360,-1235 3367.18,-1227.82 3471.95,-1227.82 Q45.1@3505.31,-1261.18
NetQ46_1: Q46.1 R52.1 | length 192.1
  Bottom Layer w10: R52.1@2740,-587.44 2740,-565 2747.18,-557.82 2877.82,-557.82 Q46.1@2898.25,-578.25
NetQ47_1: Q47.1 R53.1 | length 159.9
  Bottom Layer w10: R53.1@3347.44,-1395 3348.72,-1393.73 3348.72,-1322.78 Q47.1@3410.31,-1261.18
NetQ48_1: Q48.1 R54.1 | length 152.8
  Bottom Layer w10: R54.1@2757.44,-715 2757.44,-674.14 2768.72,-662.86 2768.72,-632.78 Q48.1@2815.32,-586.18
NetQ49_1: Q49.1 R55.1 | length 380.2
  Bottom Layer w10: R55.1@2007.44,-495 2013.54,-495 2042.25,-523.72 2082.86,-523.72 2269.79,-523.72 Q49.1@2344.68,-448.82
NetQ51_1: Q51.1 R57.1 | length 258.8
  Bottom Layer w10: R57.1@1855,-417.56 1885,-387.56 1885,-345.7 1897.88,-332.82 2006.95,-332.82 Q51.1@2040.32,-366.18
NetQ52_1: Q52.1 R58.1 | length 105.6
  Bottom Layer w10: R58.1@635,-1127.56 641.18,-1127.56 702.88,-1065.87 Q52.1@715,-1065.87
NetQ53_1: Q53.1 R59.1 | length 159.8
  Bottom Layer w10: R59.1@1892.44,-495 1892.44,-467.14 1884,-458.7 1884,-432.5 Q53.1@1950.32,-366.18
NetR100_1: R100.1 R101.2 REG3.8 ZD2.K
NetR102_1: R102.1 R103.2 REG3.6
NetR104_2: R104.2 REG3.4
OLED_CS: HDR2.11 U1.78 | length 4385.6
  Top Layer w10: U1.78@2551.65,-506.42 2551.65,-436.98 2598.63,-390 v1(2660,-390)
  Bottom Layer w10: v1@2665,-390 2807,-248 4124.33,-248 4201,-324.67 4201,-1516.63 3997.63,-1720 2973.78,-1720 HDR2.11@2932.52,-1678.74
OLED_DC: HDR2.14 U1.56 | length 1295.7
  Top Layer w10: U1.56@2679.61,-969.01 2815,-969.01 2823.01,-961 2863.7,-961 2888.1,-936.6 3151.6,-936.6 3180,-965 3180,-1185 2945,-1420 2945,-1508.78 HDR2.14@2853.78,-1600
OLED_RES: HDR2.4
OLED_SCLK: HDR2.1 U1.77 | length 3898
  Top Layer w10: U1.77@2571.34,-506.42 2571.34,-446.34 2603.68,-414 v1(2682.77,-414)
  Bottom Layer w10: v1(2682.77,-414) 2730.09,-414 2880.09,-264 4117.7,-264 4185,-331.3 4185,-1510 4035,-1660 3689.21,-1660 3654.21,-1695 3342.48,-1695 HDR2.1@3326.22,-1678.74
OLED_SDIN: HDR2.10 U1.76 | length 2318.3
  Top Layer w10: U1.76@2591.02,-506.42 2591.02,-477 2687,-477 v1(2692,-482) ; HDR2.10@3011.26,-1600 3011.26,-1429.74 3106,-1335 3469.7,-1335 3499,-1305.7 3499,-903.63 3528.53,-874.1 3528.53,-838.3 3326,-635.77 v1(3326,-621)
  Bottom Layer w10: v1(2692,-482) 2702,-492 2901,-492 2953,-544 3256,-544 3326,-614 v1(3326,-621)
PWR_REGULATORWAKE: U1.86 | length 5457.8
  Top Layer w10: v1(360,-1695) 320,-1655 320,-1600 445,-1475 v1(445,-1427) ; v1(560,-975) 562,-973 837,-973 899,-911 899,-840 936.6,-802.4 969.88,-802.4 ; U1.86@2394.17,-506.42 2394.17,-450.83 v1(2495,-350) ; v1(2656,-1162) 2664,-1170 2774,-1170 2796,-1192 v1(2796,-1255)
  Bottom Layer w10: v1(360,-1695) 2589,-1695 2718,-1566 2718,-1534.37 2796,-1456.37 v1(2796,-1255) ; v1(445,-1427) 560,-1312 v1(560,-975) ; v1(2495,-350) 2495,-603.3 2494,-604.3 2494,-875 2520,-901 2607,-901 2656,-950 v1(2656,-1162)
SAM_FWUP: R4.1 U1.40 | length 1080.2
  Top Layer w10: v1(2375,-976) 2373.71,-977.29 2373.71,-1052.98 2394.17,-1073.44 U1.40@2394.17,-1156.02 ; R4.1@2395,-167.56 2414.56,-167.56 2440,-193 v1(2440,-260)
  Bottom Layer w10: v1(2375,-976) 2471,-880 2471,-351 2440,-320 v1(2440,-260)
SAM_TST: R6.2 U1.38 | length 1461.5
  Top Layer w10: U1.38@2354.8,-1156.02 v1(2354.8,-1077) ; R6.2@2430,-1597.44 2430,-1615 2622,-1615 v1(2687,-1550) ; v1(2635,-1190) 2657,-1212 v1(2766,-1212)
  Bottom Layer w10: v1(2354.8,-1077) 2513,-1077 2548,-1042 2548,-981 2568,-961 2596,-961 2635,-1000 v1(2635,-1190) ; v1(2687,-1550) 2687,-1542.75 2766,-1463.75 v1(2766,-1212)
SOUND_OUTPUT: R95.2 R99.2 U1.55 | length 4053.6
  Top Layer w10: U1.55@2679.61,-988.7 2778.7,-988.7 v1(2795,-1005) ; R99.2@3500,-132.44 3507.56,-132.44 3542.15,-97.85 ; v1(3630,-310) 3542.15,-222.15 3542.15,-97.85 ; R95.2@4015,-137.56 3937.44,-60 3580,-60 3542.15,-97.85
  Bottom Layer w10: v1(2795,-1005) 2780,-1020 2780,-1196.3 2787,-1203.3 2787,-1216.3 2840,-1269.3 2840,-1270 3051.5,-1481.5 3311.96,-1481.5 3354.41,-1523.95 3443.95,-1523.95 3445,-1525 3815,-1525 4105,-1235 4105,-665 3962.16,-665 3933.87,-636.71 3933.87,-601.66 3882.21,-550 3688.42,-550 3630,-491.58 v1(3630,-310)
XIN: C1.2 U1.25 X1.2 | length 443.3
  Top Layer w10: X1.2@1655,-1166.54 1655,-1120 1692.56,-1082.44 C1.2@1765,-1082.44 1802.56,-1082.44 1817.56,-1067.44 U1.25@2030,-1067.44
XOUT: C2.2 U1.24 X1.1 | length 441.9
  Top Layer w10: X1.1@1655,-950 1655,-995 1692.56,-1032.56 C2.2@1765,-1032.56 1802.56,-1032.56 1817.75,-1047.75 U1.24@2030,-1047.75
pads on no net: AMP1.1 AMP1.7 AMP1.8 HDR1.A8 HDR1.CHAS HDR2.CHAS HDR3.3 HDR3.11 HDR3.15 HDR3.17 HDR3.19 LED3.1 LED3.3 LED6.3 LED6.4 LED9.3 LED9.4 LED12.3 LED12.4 LED18.1 LED18.3 R96.3 REG2.4 REG2.5 REG2.6 REG2.7 U1.5 U1.7 U1.26 U1.27 U1.28 U1.29 U1.31 U1.32 U1.36 U1.37 U1.47 U1.75 U1.79 U1.99

## Polygon pours and split planes (outlines as drawn)
GND on Bottom Layer "Bottom Layer-No Net" (solid, shelved, pour order 4): 0,-39.37 4606.3,-39.37 4606.3,-1771.65 0,-1771.65
GND on Top Layer "Top Layer-No Net" (solid, shelved, pour order 3): 1730,-860 1830,-860 1830,-935 1940,-955 1940,-1160 1830,-1180 1830,-1255 1730,-1255
GND on Top Layer "GND_PLANE" (solid, shelved, pour order 2): 0,-39.37 4606.3,-39.37 4606.3,-1771.65 0,-1771.65

## Other copper
Top Layer:
  region net 12V0S: 995,-505 780,-505 780,-740 995,-740
  rectangle net 12V0S: 495,-440 895,-265
  region net 5V0: 1340,-660 1060,-660 1060,-745 1340,-745
  region net 12V0S: 895,-315 780,-315 780,-555 895,-555
  region net 3V3: 1340,-465 1125,-465 1125,-560 1340,-560
  rectangle net NetPTC1_1: 30,-360 295,-230
  rectangle net 12V0: 30,-910 130,-375

## Silkscreen, mask and mechanical layers (free items; w line width, h text height)
Top Overlay:
  lines w7: 72.56,-1715 72.56,-1640 111.93,-1640 111.93,-1690 45,-1690 45,-1660 92.24,-1660 92.24,-1725 ; 25.31,-1740 25.31,-1625 130.31,-1625 130.31,-1740 25.31,-1740
  lines w10: 1080,-900 1080,-840 ; 2190,-80 2200,-70 2485,-70 ; 2235,-1400 2250,-1385 ; 2320,-235 2330,-225 2370,-225 2450,-305 2455,-310 2465,-310 ; 2325,-1675 2325,-1680 2340,-1695 2410,-1695 2420,-1685 ; 2330,-1375 2330,-1350 2335,-1345 ; 2920,-540 3055,-540 3085,-570 3310,-570 3315,-565 ; 2945,-1375 2950,-1380 3110,-1380 ; 3355,-865 3355,-840 3405,-840 3410,-835 ; 3735,-195 3740,-200 3985,-200 4015,-170 4235,-170
  text "BEWW" at 155.32,-1672.01 h40
  text "UWAFT InfoDisplay Rev1.0" at 505,-1720 h50
  text "2015" at 155.32,-1735 h40
Bottom Overlay:
  lines w10: 1265,-970 1305,-1010 1305,-1020 1305,-1405 1325,-1425 1590,-1425 ; 1625,-1460 1795,-1460 1855,-1400 ; 1690,-1110 1755,-1110 1805,-1060 1805,-995 1830,-970 1875,-970 ; 2365,-1140 2470,-1245 2615,-1245 ; 2400,-695 2405,-700 2405,-790 ; 2410,-440 2470,-440 2575,-335 2775,-335 ; 2900,-1010 2900,-775 2910,-765 ; 3225,-335 3255,-305 3465,-305 3480,-290 ; 3735,-970 3735,-1020 3780,-1065 4225,-1065 ; 3745,-1170 3870,-1295 4230,-1295 ; 3765,-1430 3875,-1540 4225,-1540 ; 3937.5,-777.5 3950,-790 4430,-790 ; 4090,-500 4100,-510 4510,-510

## Text inside footprints (layer, text, board x,y; h text height)
HDR3: Top Overlay "20" at 975,-240 h40; Top Overlay "19" at 980,-140 h40; Top Overlay "1" at 2095,-145 h40; Top Overlay "2" at 2090,-240 h40